# Altium PCB analogSwitchingV1.PcbDoc
Units mil, origin at the board's own origin, x right, y up, seen from the top; angles counter-clockwise.
Board outline 3400 x 1700 mil, 2 copper layers (Top Layer, Bottom Layer); 24 components, 74 nets, 146 pads, 8 vias.
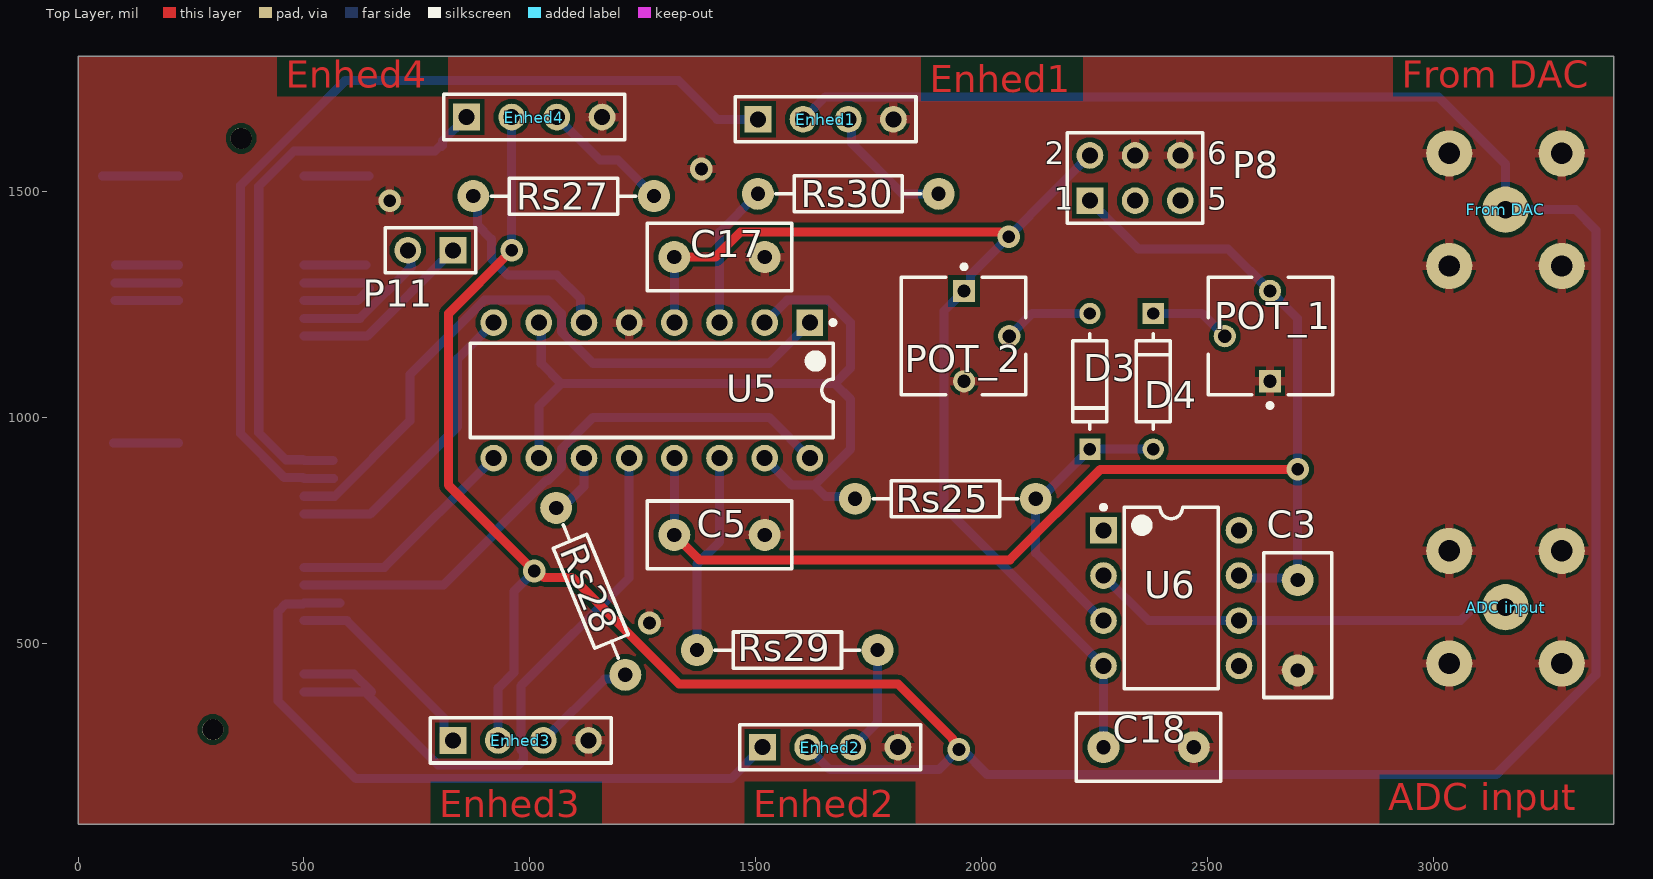
[diagram p0: Top Layer view]
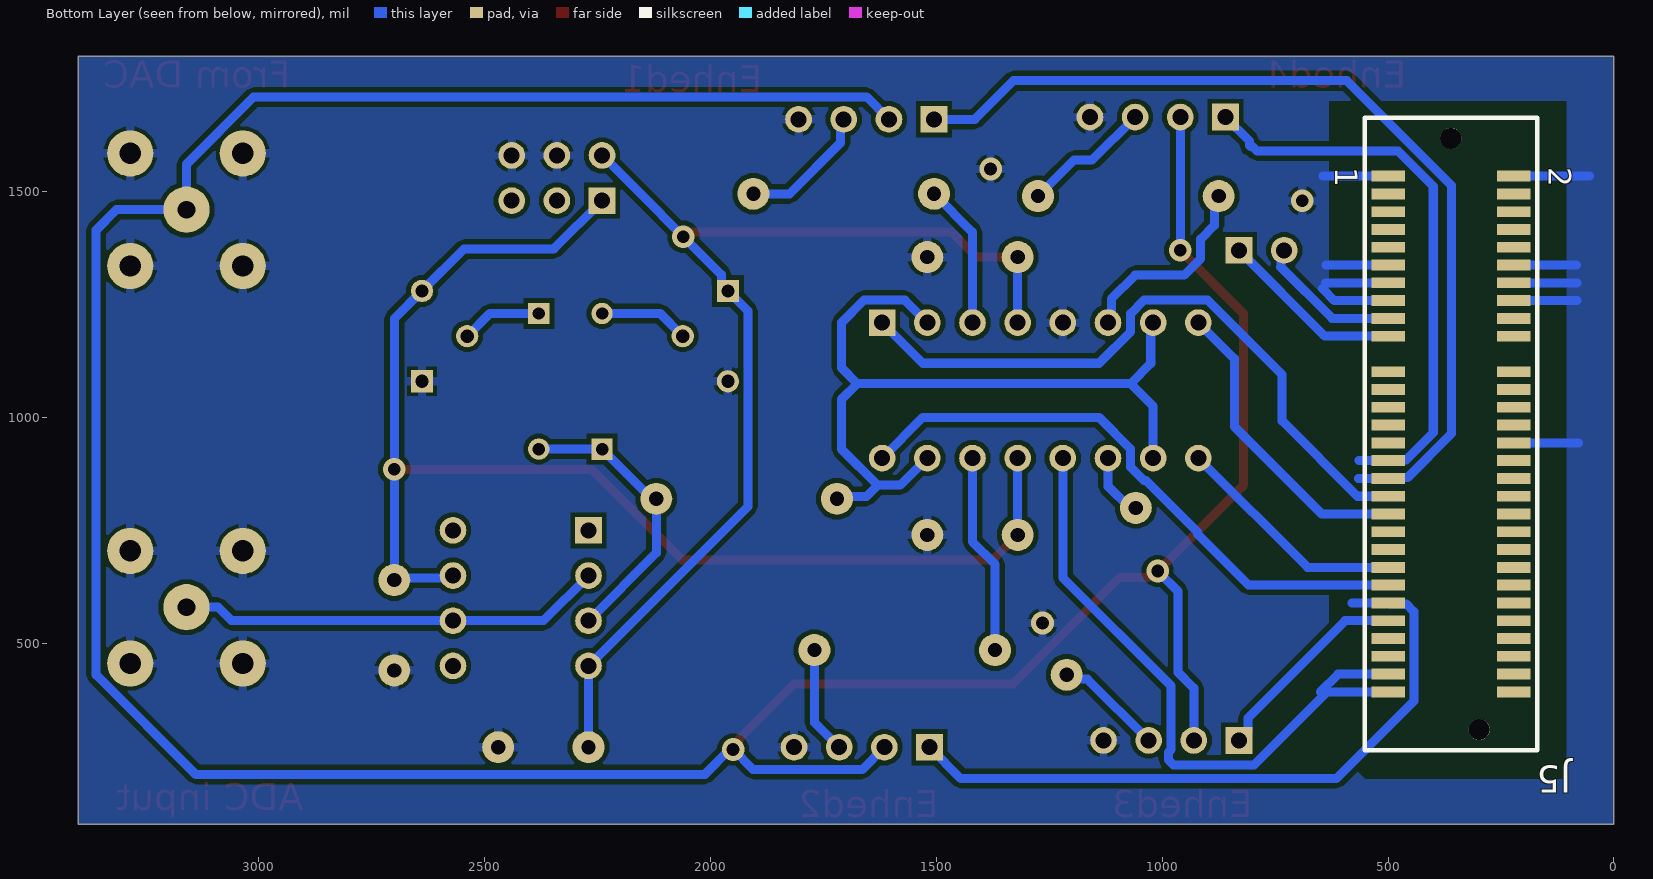
[diagram p1: Bottom Layer view, seen from below]

## Layer stack, top to bottom
Top Solder: solder mask 0.4, Solder Resist, Dk 3.5
Top Layer: signal copper 1.4
Dielectric 1: dielectric 12.6, FR-4, Dk 4.8
Bottom Layer: signal copper 1.4
Bottom Solder: solder mask 0.4, Solder Resist, Dk 3.5

## Board outline
0,100 3400,100 3400,1800 0,1800

## Design rules (kind name [scope] priority, off if disabled: settings)
Clearance [All] p1: gap=10 ignorepadtopadclearanceinfootprint=FALSE except(0: Arc-Hole Track-Hole SMDPad-Hole THPad-Hole Via-Hole Fill-Hole Poly-Hole Region-Hole Text-Hole)
HoleSize [All] p1: absolutevalues=TRUE maxlimit=118.11 minlimit=27.56 maxpercent=80.000 minpercent=20.000
MinimumSolderMaskSliver [All] p1: minsoldermaskwidth=4.92
PlaneConnect [All] p1: planeconnectstyle=Relief reliefexpansion=20 reliefentries=4 reliefconductorwidth=12 reliefairgap=10
PolygonConnect [All] p1: connectstyle=Relief reliefconductorwidth=19.68 reliefentries=4 polygonreliefangle="90 Angle" airgapwidth=7.87
RoutingVias [All] p1: holewidth=27.56 width=62.99 viastyle="Through Hole" minholewidth=27.56 minwidth=62.99 maxholewidth=27.56 maxwidth=62.99
SilkToSilkClearance [All] p1: silktosilkclearance=4.72
SilkToSolderMaskClearance [IsPad] p1: minsilkscreentomaskgap=3.94 clearancetoexposedcopper=TRUE
SolderMaskExpansion [All] p1: expansion=4 istentingtop=FALSE
Width [All] p1: maxlimit=120 minlimit=12 preferedwidth=20
25 further rules are at their usual default settings.

## Components (designator, comment, footprint, x,y, rotation, side; value= is the part's Value field where it differs from the comment)
"ADC input" "COAX-M" "BNC_B6251C1-NT3G-50 PCBK" 3160,580 r0 top (schematic designator P6)
C3 "Cap" "RAD-0.2  PCBK" 2700,540 r90 top value=100nF
C5 "Cap" "RAD-0.2  PCBK" 1420,740 r0 top value=100nF
C17 "Cap" "RAD-0.2  PCBK" 1420,1355 r180 top value=100nF
C18 "Cap" "RAD-0.2  PCBK" 2370,270 r180 top value=100nF
D3 "1N4148" FP-017AG-MFG 2240,1080 r90 top
D4 "1N4148" FP-017AG-MFG 2380,1080 r270 top
Enhed1 "Header 4" HDR1X4 1505,1660 r0 top (schematic designator P4)
Enhed2 "Header 4" HDR1X4 1515,270 r0 top (schematic designator P7)
Enhed3 "Header 4" HDR1X4 830,285 r0 top (schematic designator P9)
Enhed4 "Header 4" HDR1X4 860,1665 r0 top (schematic designator P10)
"From DAC" "COAX-M" "BNC_B6251C1-NT3G-50 PCBK" 3160,1460 r0 top (schematic designator P5)
J5 "MEC1-130-02-XX-D-A" MEC1-130-02-XX-D-A 361,963.39 r270 bottom
P8 "PowerCon" HDR2X3 2240,1480 r0 top
P11 "I2C" HDR1X2 830,1370 r180 top
POT_1 "3362P-1-103LF" BOUR-3362P 2640,1180 r90 top
POT_2 "3362P-1-103LF" BOUR-3362P 1960,1180 r270 top
Rs25 "20k" "AXIAL-0.4 PCBK" 1920,820 r180 top value=100
Rs27 "1k5" "AXIAL-0.4 PCBK" 1075,1490 r0 top value=100
Rs28 "1k5" "AXIAL-0.4 PCBK" 1135,615 r292.5 top value=100
Rs29 "1k5" "AXIAL-0.4 PCBK" 1570,485 r0 top value=100
Rs30 "1k5" "AXIAL-0.4 PCBK" 1705,1495 r0 top value=100
U5 "ADG411BNZ" ADI-N-16 1270,1060 r270 top
U6 "TLC2201CP" P0008A 2420,600 r0 top

## Footprints (in the part's own frame and the unit in brackets; to place one, negate y for a bottom-side part, rotate by r counter-clockwise, add the part's x,y. Pads: shape width x height; smd on the part's side, far side on the other; paste and mask are expansions set on the pad)
ADI-N-16 [mm] "DIP, 16-Leads, Body 20.07x6.6mm, Pitch 2.54mm"
  rect 1.5x1.5 hole 0.9: 1(-3.81,8.89)
  round 1.5 hole 0.9: 2(-3.81,6.35) 3(-3.81,3.81) 4(-3.81,1.27) 5(-3.81,-1.27) 6(-3.81,-3.81) 7(-3.81,-6.35) 8(-3.81,-8.89) 9(3.81,-8.89) 10(3.81,-6.35) 11(3.81,-3.81) 12(3.81,-1.27) 13(3.81,1.27) 14(3.81,3.81) 15(3.81,6.35) 16(3.81,8.89)
  silkscreen extent -3.93,-10.2 2.65,10.32, body extent -3.95,-10.15 3.95,10.15, height 5.33
"AXIAL-0.4 PCBK" [mm]
  round 1.8 hole 0.8: 1(-5.08,0) 2(5.08,0)
  silkscreen extent -4.06,-1.02 4.06,1.02
"BNC_B6251C1-NT3G-50 PCBK" [mm]
  round 2.6 hole 1: 1(0,0)
  round 2.6 hole 1.2: 2(-3.164,3.164) 3(3.164,3.164) 4(3.164,-3.164) 5(-3.164,-3.164)
  body extent -5.42,-5.58 5.58,5.42, height 18.2
BOUR-3362P [mm] "THD, 3-Leads, Body 6.6x6.99mm, Pitch 2.54mm"
  rect 1.25x1.25 hole 0.75: 1(-2.54,0.035)
  round 1.25 hole 0.75: 2(0,2.575) 3(2.54,0.035)
  silkscreen extent -4.02,-3.49 3.3,3.5, body extent -3.3,-3.49 3.3,3.49, height 4.95
FP-017AG-MFG [mm]
  rect 1.2x1.2 hole 0.7 paste-1000 mask+0: 1(-3.813,0)
  round 1.2 hole 0.7 paste-1000 mask+0: 2(3.813,0)
  silkscreen extent -2.68,-0.95 2.68,0.95, body extent -4.51,-1.05 4.51,1.05, height 0.25
HDR1X2 [mm] "Connector; Header; 2 Position"
  rect 1.5x1.5 hole 0.9: 1(0,0)
  round 1.5 hole 0.9: 2(2.54,0)
  silkscreen extent -1.27,-1.27 3.81,1.27
HDR1X4 [mm] "Connector; Header; 4 Position"
  rect 1.5x1.5 hole 0.9: 1(0,0)
  round 1.5 hole 0.9: 2(2.54,0) 3(5.08,0) 4(7.62,0)
  silkscreen extent -1.27,-1.27 8.89,1.27
HDR2X3 [mm] "Connector; Header; 3x2 Position"
  rect 1.5x1.5 hole 0.9: 1(0,0)
  round 1.5 hole 0.9: 2(0,2.54) 3(2.54,0) 4(2.54,2.54) 5(5.08,0) 6(5.08,2.54)
  silkscreen extent -1.27,-1.27 6.35,3.81
MEC1-130-02-XX-D-A [mm]
  rect 0.61x1.88 smd: 1(-14.5,-3.531) 2(-14.5,3.531) 3(-13.5,-3.531) 4(-13.5,3.531) 5(-12.5,-3.531) 6(-12.5,3.531) 7(-11.5,-3.531) 8(-11.5,3.531) 9(-10.5,-3.531) 10(-10.5,3.531) 11(-9.5,-3.531) 12(-9.5,3.531) 13(-8.5,-3.531) 14(-8.5,3.531) 15(-7.5,-3.531) 16(-7.5,3.531) 17(-6.5,-3.531) 18(-6.5,3.531) 19(-5.5,-3.531) 20(-5.5,3.531) 23(-3.5,-3.531) 24(-3.5,3.531) 25(-2.5,-3.531) 26(-2.5,3.531) 27(-1.5,-3.531) 28(-1.5,3.531) 29(-0.5,-3.531) 30(-0.5,3.531) 31(0.5,-3.531) 32(0.5,3.531) 33(1.5,-3.531) 34(1.5,3.531) 35(2.5,-3.531) 36(2.5,3.531) 37(3.5,-3.531) 38(3.5,3.531) 39(4.5,-3.531) 40(4.5,3.531) 41(5.5,-3.531) 42(5.5,3.531) 43(6.5,-3.531) 44(6.5,3.531) 45(7.5,-3.531) 46(7.5,3.531) 47(8.5,-3.531) 48(8.5,3.531) 49(9.5,-3.531) 50(9.5,3.531) 51(10.5,-3.531) 52(10.5,3.531) 53(11.5,-3.531) 54(11.5,3.531) 55(12.5,-3.531) 56(12.5,3.531) 57(13.5,-3.531) 58(13.5,3.531) 59(14.5,-3.531) 60(14.5,3.531)
  round 1.194 hole 1.194 unplated: ""(-16.622,0) ""(16.622,1.588)
  silkscreen extent -17.77,-4.85 17.77,4.85
P0008A [mm] "DIP, 8-Leads, Body 10.15x6.6mm, Pitch 2.54mm"
  rect 1.5x1.5 hole 0.9: 1(-3.81,3.81)
  round 1.5 hole 0.9: 2(-3.81,1.27) 3(-3.81,-1.27) 4(-3.81,-3.81) 5(3.81,-3.81) 6(3.81,-1.27) 7(3.81,1.27) 8(3.81,3.81)
  silkscreen extent -3.93,-5.1 2.65,5.23, body extent -3.95,-5.07 3.95,5.07, height 5.08
"RAD-0.2  PCBK" [mm]
  round 1.8 hole 0.8: 1(-2.54,0) 2(2.54,0)
  silkscreen extent -4.06,-1.91 4.06,1.91

## Part data
"ADC input" "From DAC": library part "BNC PCBK", "RF Coaxial PCB Connector, MMCX; Thru-Hole, Vertical Mount Plug,  50 Ohm Impedance", PackageDocument="Rev. A, 16-Jun-1997", ComponentLink1Description="Manufacturer Link", ComponentLink1URL=http://www.amphenolrf.com/, DatasheetDocument=30-May-2003, DrillSize="Corresponds to nominal value.", LatestRevisionDate=15-Jul-2004, LatestRevisionNote="Component Replaced.", PackageReference=908-21103, PCB_Layout="Complies with manufacturer's recommendation.", Published=15-Jul-2004, Publisher="Altium Limited"
C3 C5 C17 C18: library part "Cap PCBK", "Capacitor", LatestRevisionDate=17-Jul-2002, LatestRevisionNote="Re-released for DXP Platform.", PackageReference=RAD-0.3, Published=8-Jun-2000, Publisher="Altium Limited"
D3 D4: library part CMP-07163-000046-1, "DIODE GEN PURP 100V 200MA DO35", Average Rectified Current=200mA, Capacitance=4pF, Case/Package=DO-35, Current=4A, Forward Current=300mA, Forward Voltage=1V, Max Forward Surge Current (Ifsm)=1A, Max Operating Temperature=175°C, Max Power Dissipation=500mW, Max Repetitive Reverse Voltage (Vrrm)=100V, Max Reverse Current=5uA, Min Operating Temperature=-65°C, Package Quantity=2000, Contact Plating=Tin, Current Rating=200mA, Diameter=1.91mm, Element Configuration=Single, Height=4.56mm, Lead Free="Lead Free", Length=4.56mm, Max Reverse Voltage (DC)=100V, Max Surge Current=4A, Mount="Through Hole", Number of Pins=2, Output Current=200mA, Outside Diameter=1.85mm, Packaging=Bulk, Peak Non-Repetitive Surge Current=4A, Polarity=Standard, Power Dissipation=500mW, Radiation Hardening=No, REACH SVHC="No SVHC", Recovery Time=4ns, Reverse Recovery Time=4ns, Reverse Voltage=100V, Series=-, Voltage=100V, Voltage Rating (DC)=100V, Weight=0.01lb, Width=1.91mm
Enhed1 Enhed2 Enhed3 Enhed4: "Header, 4-Pin", LatestRevisionDate=17-Jul-2002, LatestRevisionNote="Re-released for DXP Platform.", Publisher="Altium Limited"
J5: "1MM MINI-EDGE CARD ASSEMBLY.  MANUFACTURER: SAMTEC.", Package=None, Availability=Unavailable, MF=Samtec, MP=MEC1-130-02-XX-D-A, Price=None
P8: library part "Header 3X2", "Header, 3-Pin, Dual row", LatestRevisionDate=17-Jul-2002, LatestRevisionNote="Re-released for DXP Platform.", Publisher="Altium Limited"
P11: library part "Header 2", "Header, 2-Pin", LatestRevisionDate=17-Jul-2002, LatestRevisionNote="Re-released for DXP Platform.", Publisher="Altium Limited"
POT_1 POT_2: library part CMP-1747-00004-1, "Square Trimpot(R) Trimming Potentiometer, 10 KOhm, 300 V, -55 to 125 degC, 3-Pin THD, RoHS, Tube", Case Code (Imperial)=0612, Case Code (Metric)=1632, Case/Package=1206, Max Operating Temperature=125degC, Min Operating Temperature=-25degC, Package Quantity=5000, Power Rating="1 W", Resistance="50 mohm", Tolerance=1%, Voltage Rating="220 mV", ComponentLink1Description="Manufacturer URL", ComponentLink1URL=http://www.bourns.com/, ComponentLink2Description=Datasheet, ComponentLink2URL=http://www.bourns.com/docs/Product-Datasheets/3362.pdf, DatasheetVersion=May-16, Height="0.6 mm", Length="3.2 mm", Mount="Surface Mount", PackageDescription="3-Pin Through Hole Device, Body 6.6 x 6.99 mm, Pitch 2.54 mm", PackageReference=3326P, Packaging="Tape and Reel", Pins=2, REACH SVHC="No SVHC", RoHSCompliant=True, Width="1.6 mm"
Rs25 Rs27 Rs28 Rs29 Rs30: library part "Res PCBK", "Resistor", LatestRevisionDate=17-Jul-2002, LatestRevisionNote="Re-released for DXP Platform.", PackageReference=AXIAL-0.4, Published=8-Jun-2000, Publisher="Altium Limited"
U5: library part CMP-0792-00016-1, "LC2MOS Precision Quad SPST Switches, 25 Ohm Ron, 16-pin DIP (N-16), Tube", Manufacturer="Analog Devices", # Sw Functions=4, Code_JEDEC=MS-001, ComponentLink1Description="Manufacturer URL", ComponentLink1URL=http://www.analog.com/en/index.html, ComponentLink2Description=Datasheet, ComponentLink2URL=http://www.analog.com/static/imported-files/data_sheets/ADG411_412_413.pdf, ComponentLink3Description="Package Specification", ComponentLink3URL=http://www.analog.com/static/imported-files/packages/44768431550332N_16.pdf, Configuration=SPST, DatasheetVersion="Rev. D", Max Neg Supply=-16.5V, Max Pos Supply=+16.5V, Mounting Technology="Through Hole", PackageDescription="16-Pin Plastic Dual In-Line Package, Row spacing 7.62 mm, Pitch 2.54 mm", PackageReference=N-16, PackageVersion="070706-A, 07/2006", Packing=Tube, PartNumber=ADG411BNZ, Ron (ohms)="25, 40", t ON="110ns, 175ns"
U6: library part CMP-0272-02451-3, "Low Noise Precision Rail-to-Rail Output Operational Amplifier, 4.6 to 16 V, 0 to 70 degC, 8-pin DIP (P8), Pb-Free (RoHS)", Manufacturer="Texas Instruments", Rating=Catalog, Total Supply Voltage(Max)(+5V is 5, +/-5V is 10)=16, Total Supply Voltage(Min)(+5V is 5, +/-5V is 10)=4.6, CMRR(Min)(dB)=85, Code_JEDEC=MS-001, ComponentLink1Description="Manufacturer URL", ComponentLink1URL=http://www.ti.com/, ComponentLink2Description=Datasheet, ComponentLink2URL=http://www.ti.com/lit/ds/symlink/tlc2201.pdf, ComponentLink3Description="Package Specification", ComponentLink3URL=http://www.ti.com/litv/pdf/mpdi001b, DatasheetVersion=SLOS175B, Eco-Plan="Pb-Free (RoHS)", GBW(Typ)(MHz)=1.9, IIB(Max)(pA)=60, Iq per channel(Max)(mA)=1.5, Mounting Technology="Through Hole", Number of Channels=1, Offset Drift(Typ)(uV/C)=0.5, PackageDescription="8-Pin Plastic In-Line, Body 9.59 x 6.35 mm, Pitch 2.54 mm", PackageReference=P0008A, PackageVersion="4040082/E, 04/2010", Packing=TUBE, PartNumber=TLC2201CP, Slew Rate(Typ)(V/us)=2.7, Sub Family="Low Noise Amp (<=10nV/rtHz), Low Offset Voltage Amplifier (<=60uV), Precision Amplifier", Vio (25C)(Max)(mV)=0.5

## Via types
v1: diameter 50, hole 28, Top Layer to Bottom Layer, 8 vias

## Nets (pads, with @x,y where several pads share a name; then routed paths per layer and width w, separated by ;. In a path a pad name is that pad's centre, name@x,y a point inside that pad or via, vN(x,y) a via of type N, cw(c..) or ccw(c..) an arc to the next point about the centre after c; other vN are vias at no path point)
ADC_input: "ADC input.1" U6.2 U6.6 | length 944.3
  Bottom Layer w20: U6.2 2370,550 U6.6 3060,550 3090.53,580.53 3159.47,580.53 3160,580
adcEnable1: J5.37 U5.1 | length 1478.3
  Bottom Layer w20: J5.37 568.02,825.59 734.76,992.33 734.76,1094.8 899.48,1259.53 1008.05,1259.53 1040.52,1259.53 1070,1230.04 1070,1189.96 1139.96,1120 1530,1120 U5.1
adcEnable2: J5.47 U5.16 | length 1337.3
  Bottom Layer w20: J5.47 808.78,628.74 922.14,742.1 922.14,746.85 1035.5,860.21 1040.25,860.21 1070,889.96 1070,930.04 1139.96,1000 1530,1000 U5.16
adcEnable3: J5.45 U5.9 | length 520.2
  Bottom Layer w20: J5.45 678.11,668.11 U5.9
adcEnable4: J5.39 U5.8 | length 683.4
  Bottom Layer w20: J5.39 646.22,786.22 840,980 840,1130 U5.8
DAC_output: "From DAC.1" Enhed1.2 Enhed2.2 Enhed3.2 Enhed4.2 | length 7498.9
  Top Layer w20: v1(960,1370) 820,1230 820,850 v1(1010,660) 1018.12,660 1032.01,646.11 1093.89,646.11 1330,410 1815,410 1936.11,288.89 1936.11,287.01 1950,273.12 v1(1950,265)
  Bottom Layer w20: Enhed3.2 930,400.51 965,435.51 965,615 v1(1010,660) ; v1(960,1370) Enhed4.2 ; Enhed1.2 1654.53,1709.53 3011.14,1709.53 3160,1560.67 3160,1460 3315,1460 3360,1415 3360,430.18 3139.39,209.57 2012.35,209.57 1956.92,265 v1(1950,265) 1905.47,220.47 1664.53,220.47 Enhed2.2
Enable: 
Enable1: Enhed1.1 J5.35 | length 2072.2
  Bottom Layer w20: 564.96,864.96 J5.35 497.99,866.97 457.01,866.97 360,963.97 360,1513.98 591.45,1745.43 1329.57,1745.43 1415,1660 Enhed1.1
Enable2: Enhed2.1 J5.49 | length 1514.3
  Bottom Layer w20: 579.37,589.37 J5.49 497.99,587.36 460.06,587.36 442.99,570.29 442.99,372.23 614.75,200.47 767.36,200.47 1445.47,200.47 Enhed2.1
Enable3: Enhed3.1 J5.51 | length 457.3
  Bottom Layer w20: J5.51 595,550 810.47,334.53 810.47,304.53 Enhed3.1
Enable4: Enhed4.1 J5.33 | length 1264.6
  Bottom Layer w20: 564.33,904.33 J5.33 497.99,906.34 460.06,906.34 400,966.4 400,1511.55 478.45,1590 790.47,1590 799.92,1599.45 804.45,1599.45 807.19,1602.19 807.19,1612.19 Enhed4.1
FromDAC: 
GND: "ADC input.2" "ADC input.3" "ADC input.4" "ADC input.5" "From DAC.2" "From DAC.3" "From DAC.4" "From DAC.5" C3.1 C5.2 C17.1 C18.1 Enhed1.4 Enhed2.4 Enhed3.4 Enhed4.4 J5.1 J5.2 J5.11 J5.12 J5.13 J5.14 J5.15 J5.16 J5.32 P8.4 P8.6 POT_1.1 POT_2.3 U5.5 | length 1307
  Bottom Layer w20: 54.25,1534.25 J5.2 ; 78.7,943.7 J5.32 ; 81.34,1258.66 J5.16 ; 81.97,1298.03 J5.14 ; 82.4,1337.4 J5.12 ; J5.15 618.66,1258.66 645,1285 ; J5.13 638.03,1298.03 ; J5.11 637.4,1337.4 ; J5.1 644.25,1534.25
  other v1: 1265,545 690,1480 1380,1550
NetC1_1: 
NetC2_2: 
NetC4_1: 
NetC6_1: 
NetD1_1: 
NetD3_1: D3.1 D4.2 Rs25.1 U6.3 | length 637.6
  Bottom Layer w20: U6.3 2120,700 Rs25.1 2130.12,820 D3.1 D4.2
NetD3_2: D3.2 POT_2.2 | length 199.4
  Bottom Layer w20: POT_2.2 2111.5,1230.12 D3.2
NetD4_1: D4.1 POT_1.2 | length 179.4
  Bottom Layer w20: D4.1 2488.5,1230.12 POT_1.2
NetJ1_1: 
NetJ1_2: 
NetJ1_4: 
NetJ1_6: 
NetJ2_1: 
NetJ2_2: 
NetJ2_4: 
NetJ2_6: 
NetJ3_1: 
NetJ3_5: 
NetJ4_6: 
NetJ5_57: J5.57 J5.59 U5.12 | length 1508.7
  Bottom Layer w20: J5.59 635.14,392.52 ; J5.57 610.63,431.89 650,392.52 635.14,392.52 ; U5.12 1220,645 980.47,405.47 980.47,264.48 986.2,258.76 986.2,242.19 974.48,230.47 797.19,230.47 635.14,392.52
NetP3_1: 
Netpot1_1: 
Netpot1_3: 
Netpot2_1: 
Netpot2_3: 
Netpot3_1: 
Netpot3_3: 
NetQ1_B: 
NetQ2_2: 
NetQ3_1: 
NetQ3_3: 
NetRs1_2: 
NetRs3_2: 
NetRs4_2: 
NetRs5_2: 
NetRs6_2: 
NetRs14_1: 
NetRs14_2: 
NetRs15_2: 
NetRs16_2: 
NetRs17_2: 
NetRs23_1: 
NetRs25_2: Rs25.2 U5.2 U5.7 U5.10 U5.15 | length 1836.8
  Bottom Layer w20: U5.10 1020,1025 1070,1075 ; U5.7 1025.37,1204.63 1025.37,1119.63 1070,1075 ; U5.15 1580,850 1630.04,850 ; U5.2 1569.53,1259.53 1660.47,1259.53 1710,1210 1710,1110 1675,1075 ; Rs25.2 1714.52,825.48 1654.57,825.48 1630.04,850 ; 1070,1075 1675,1075 ; 1630.04,850 1710,929.96 1710,1040 1675,1075
NetRs27_1: Rs27.1 U5.6 | length 445.1
  Bottom Layer w20: Rs27.1 884.73,1480.27 884.73,1425.27 915,1395 915,1351.36 951.36,1315 1060,1315 1112.53,1262.47 1112.53,1217.47 U5.6
NetRs28_1: Rs28.1 U5.11 | length 143.8
  Bottom Layer w20: Rs28.1 1072.23,799.78 1120,847.55 U5.11
NetRs29_1: Rs29.1 U5.14 | length 445.7
  Bottom Layer w20: Rs29.1 1370,675 1420,725 U5.14
NetRs30_1: Rs30.1 U5.3 | length 320.2
  Bottom Layer w20: U5.3 1420,1410 Rs30.1
PowerAmpOut: 
SCL: J5.19 P11.1 | length 408.7
  Bottom Layer w20: J5.19 500.04,1179.96 639.96,1179.96 P11.1
SDA: J5.17 P11.2 | length 325.1
  Bottom Layer w20: J5.17 624.03,1219.29 737.78,1333.04 737.47,1333.34 737.47,1362.53 P11.2
SwitchedVCC+: 
SwitchedVCC-: 
ToADC: 
ToADC_1: Enhed1.3 Rs30.2 | length 294.7
  Bottom Layer w20: Enhed1.3 1712.47,1652.53 1712.47,1607.53 1825,1495 Rs30.2
ToADC_2: Enhed2.3 Rs29.2 | length 237.8
  Bottom Layer w20: Enhed2.3 1770,325 Rs29.2
ToADC_3: Enhed3.3 Rs28.2 | length 241.7
  Bottom Layer w20: Enhed3.3 1165.49,420.49 1201.8,420.49 Rs28.2
ToADC_4: Enhed4.3 Rs27.2 | length 287.5
  Bottom Layer w20: Enhed4.3 1155,1570 1195,1570 Rs27.2
VCC+: 
VCC++: C3.2 C5.1 P8.1 POT_1.3 U5.13 U6.7 | length 2937
  Top Layer w20: C5.1 1375.43,684.57 2062.96,684.57 2263.39,885 v1(2700,885)
  Bottom Layer w20: C5.1 U5.13 ; P8.1 2346.97,1373.03 2545.59,1373.03 POT_1.3 2700,1218.62 C3.2 2695,645 2575,645 U6.7
VCC-: 
VCC--: C17.2 C18.2 P8.2 POT_2.1 U5.4 U6.4 | length 2502.5
  Top Layer w20: C17.2 1410.65,1355 1466.08,1410.43 2041.45,1410.43 2051.88,1400 v1(2060,1400)
  Bottom Layer w20: U5.4 C17.2 ; P8.2 1975.98,1315.98 1975.98,1294.61 POT_2.1 1916.77,1235.39 1916.77,803.23 U6.4 2270,330.43 C18.2
pads on no net: J5. J5.3 J5.4 J5.5 J5.6 J5.7 J5.8 J5.9 J5.10 J5.18 J5.20 J5.23 J5.24 J5.25 J5.26 J5.27 J5.28 J5.29 J5.30 J5.31 J5.34 J5.36 J5.38 J5.40 J5.41 J5.42 J5.43 J5.44 J5.46 J5.48 J5.50 J5.52 J5.53 J5.54 J5.55 J5.56 J5.58 J5.60 P8.3 P8.5 U6.1 U6.5 U6.8

## Polygon pours and split planes (outlines as drawn)
GND on Top Layer "GND_L01_P000" (solid, remove dead copper, pour order 0): 0,1800 3400,1800 3400,100 0,100
GND on Bottom Layer "GND_L02_P001" (solid, remove dead copper, pour order 1): 0,1800 3400,1800 3400,100 0,100

## Other copper
Bottom Layer:
  pour cut-out: 630,1700 630,280 550,200 105,200 105,1700

## Text inside footprints (layer, text, board x,y; h text height)
J5: Bottom Overlay "1" at 617.06,1554.29 h50.03 r90; Bottom Overlay "2" at 144.38,1554.17 h50.02 r90
P8: Top Overlay "6" at 2500,1560 h50; Top Overlay "5" at 2500,1460 h50; Top Overlay "2" at 2140,1560 h50; Top Overlay "1" at 2160,1460 h50